# Altium PCB Frida.PcbDoc
Units mm, origin at the board's own origin, x right, y up, seen from the top; angles counter-clockwise.
Board outline 29 x 39 mm, 4 copper layers (L1 (Signal), L2 (GND), L3 (GND), L4 (Signal)), stack 1.586 mm thick; 65 components, 46 nets, 216 pads, 161 vias.
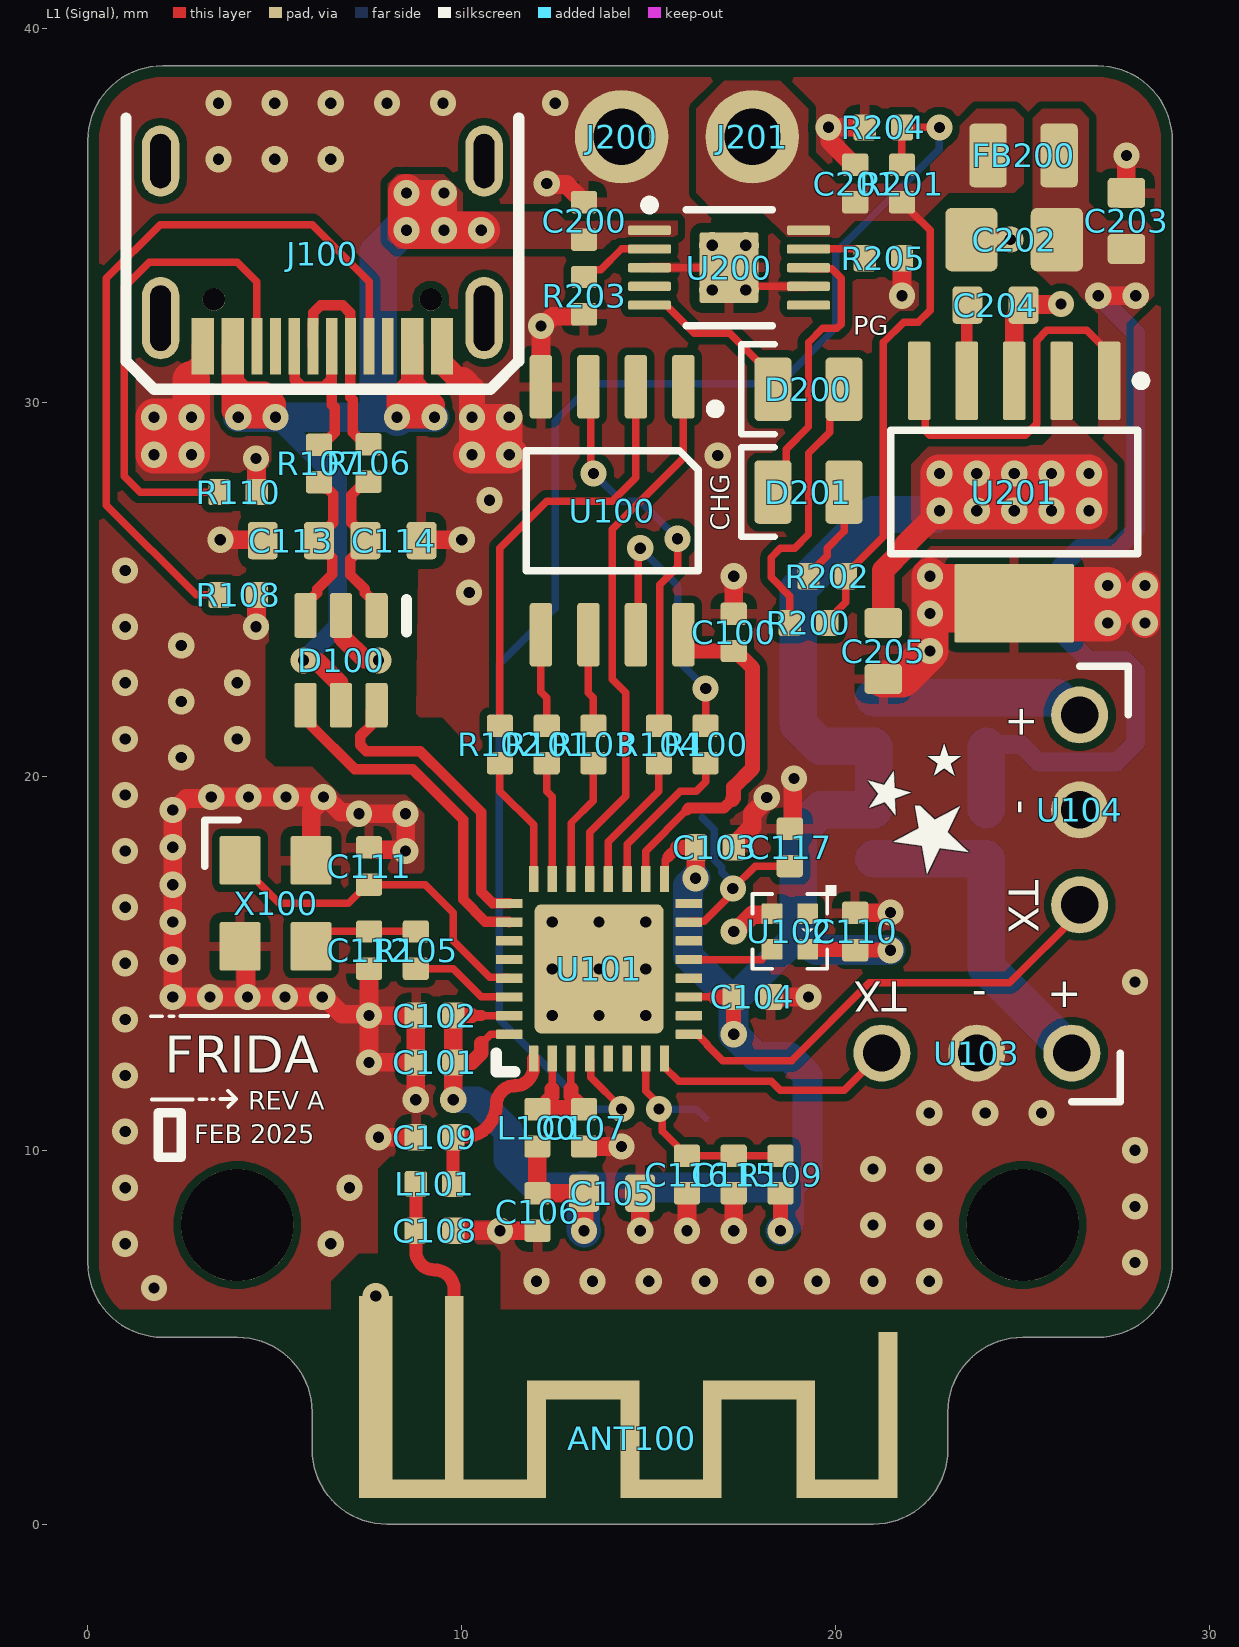
[diagram p0: L1 (Signal) view]
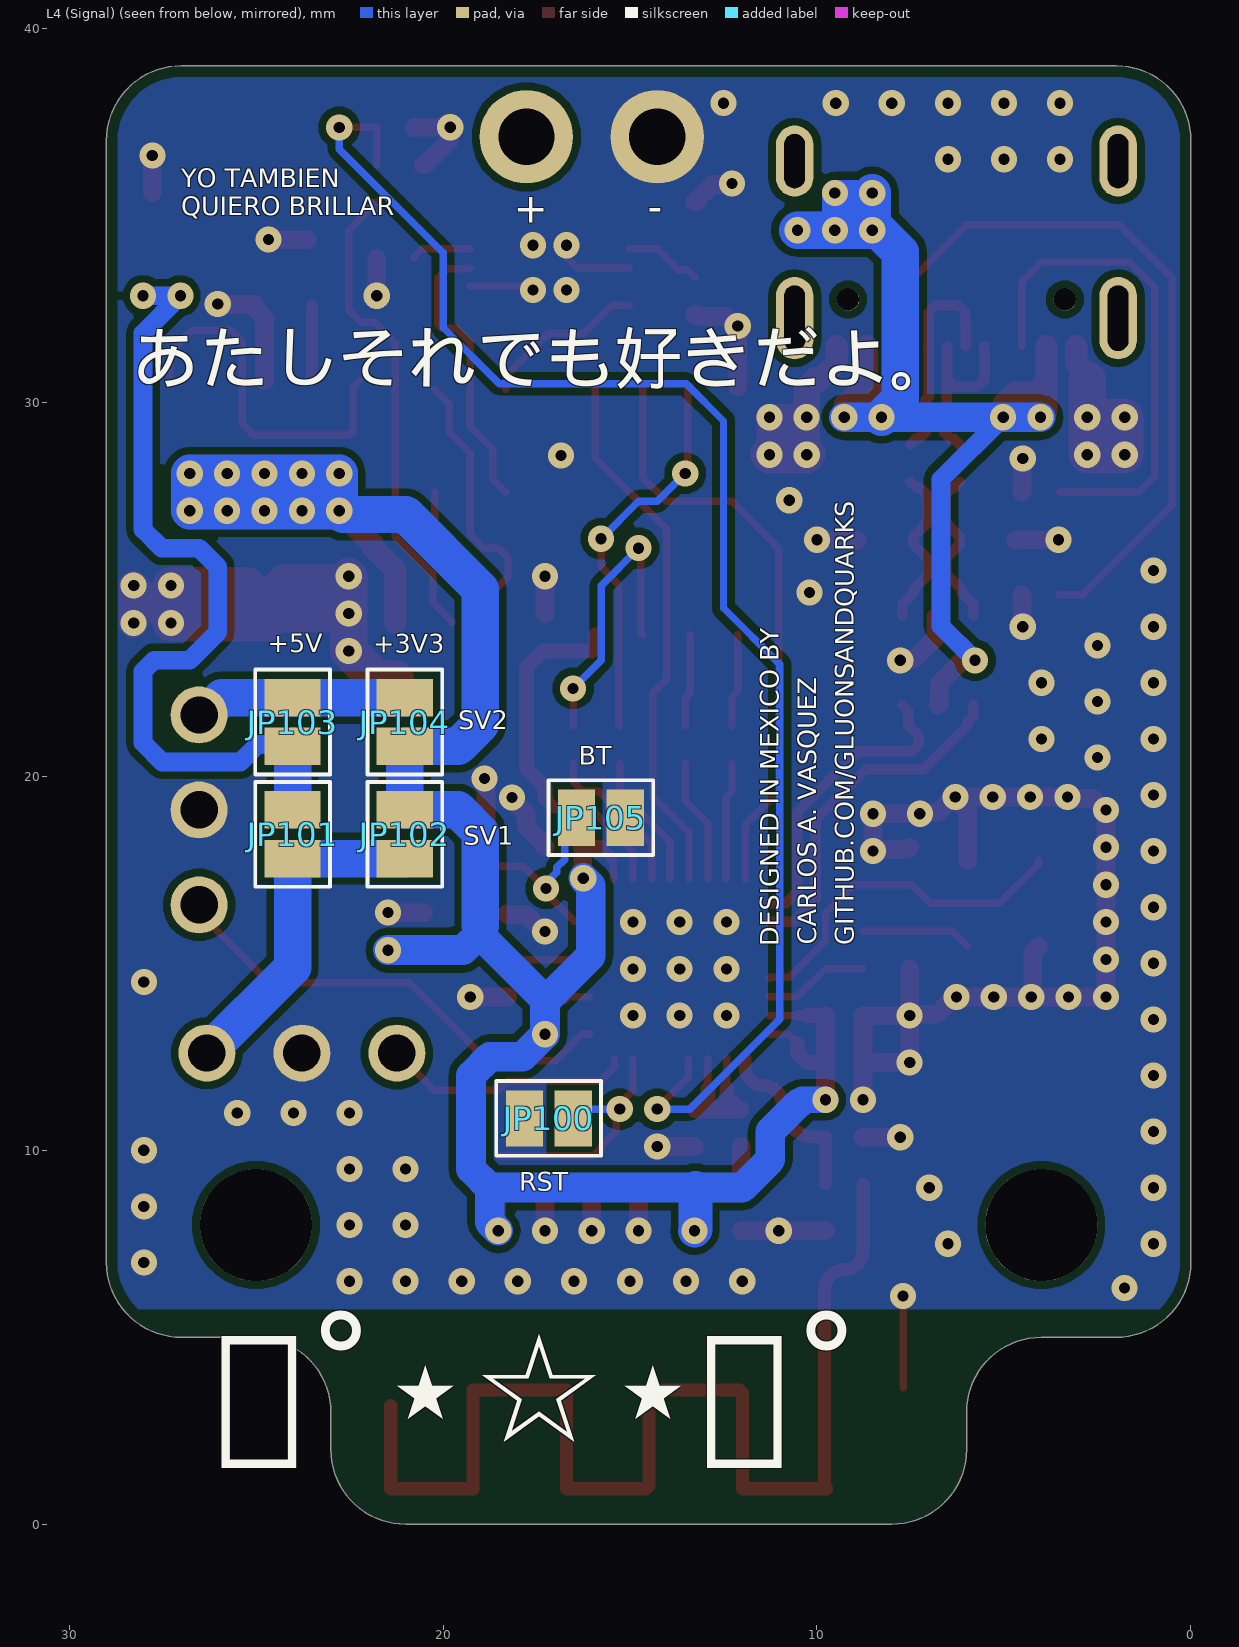
[diagram p1: L4 (Signal) view, seen from below]
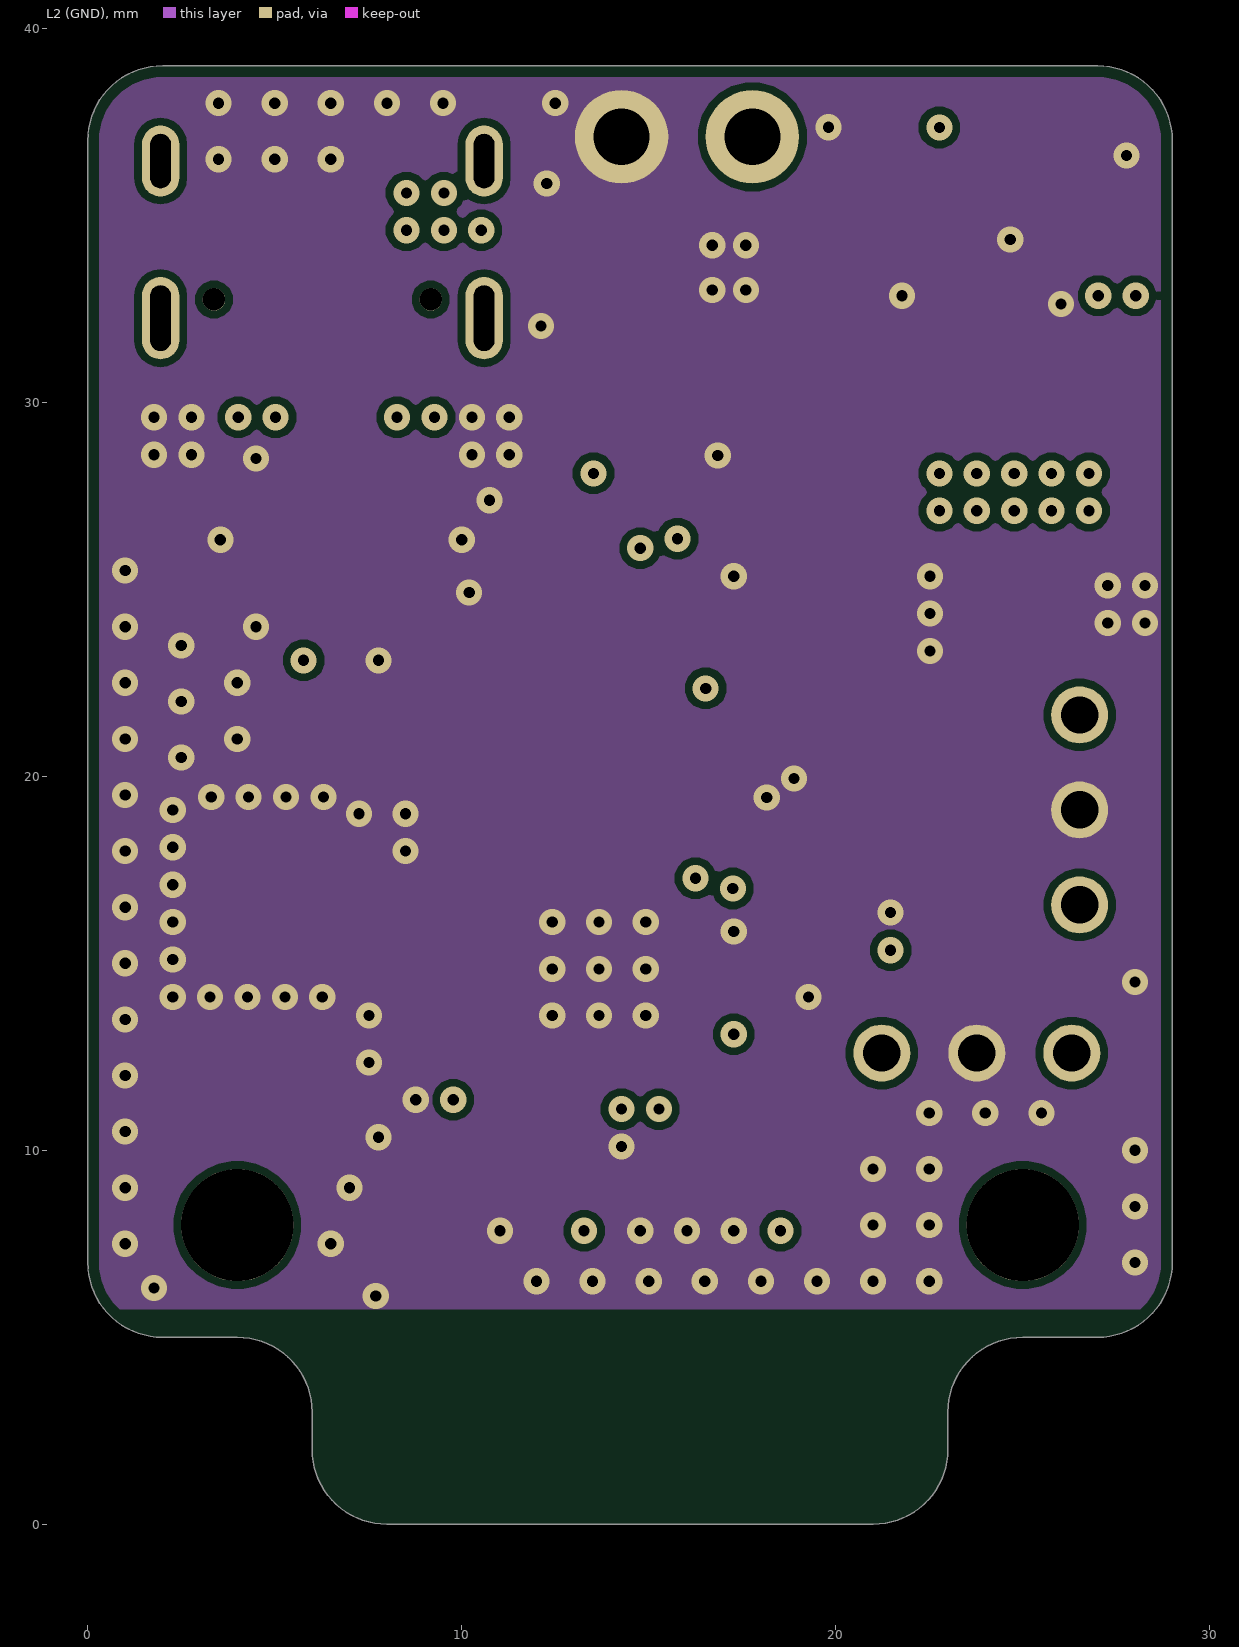
[diagram p2: L2 (GND)]
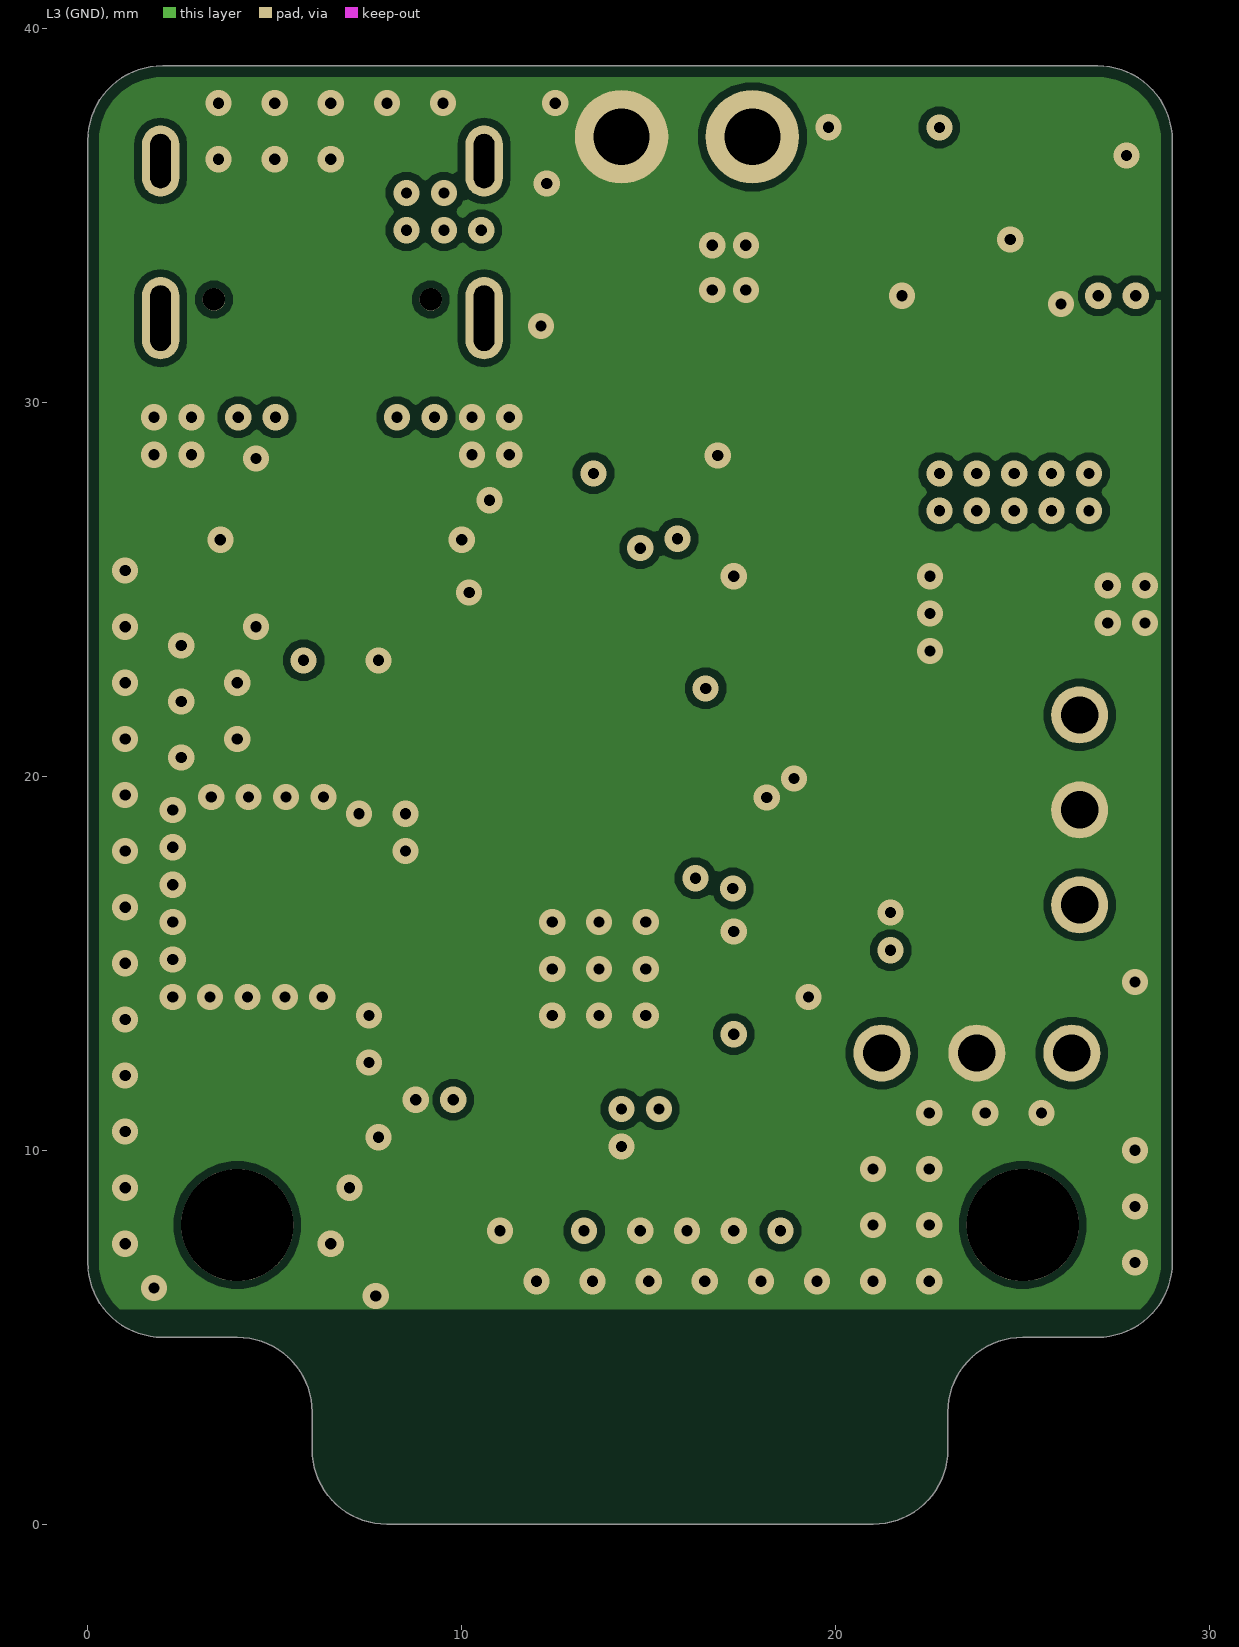
[diagram p3: L3 (GND)]
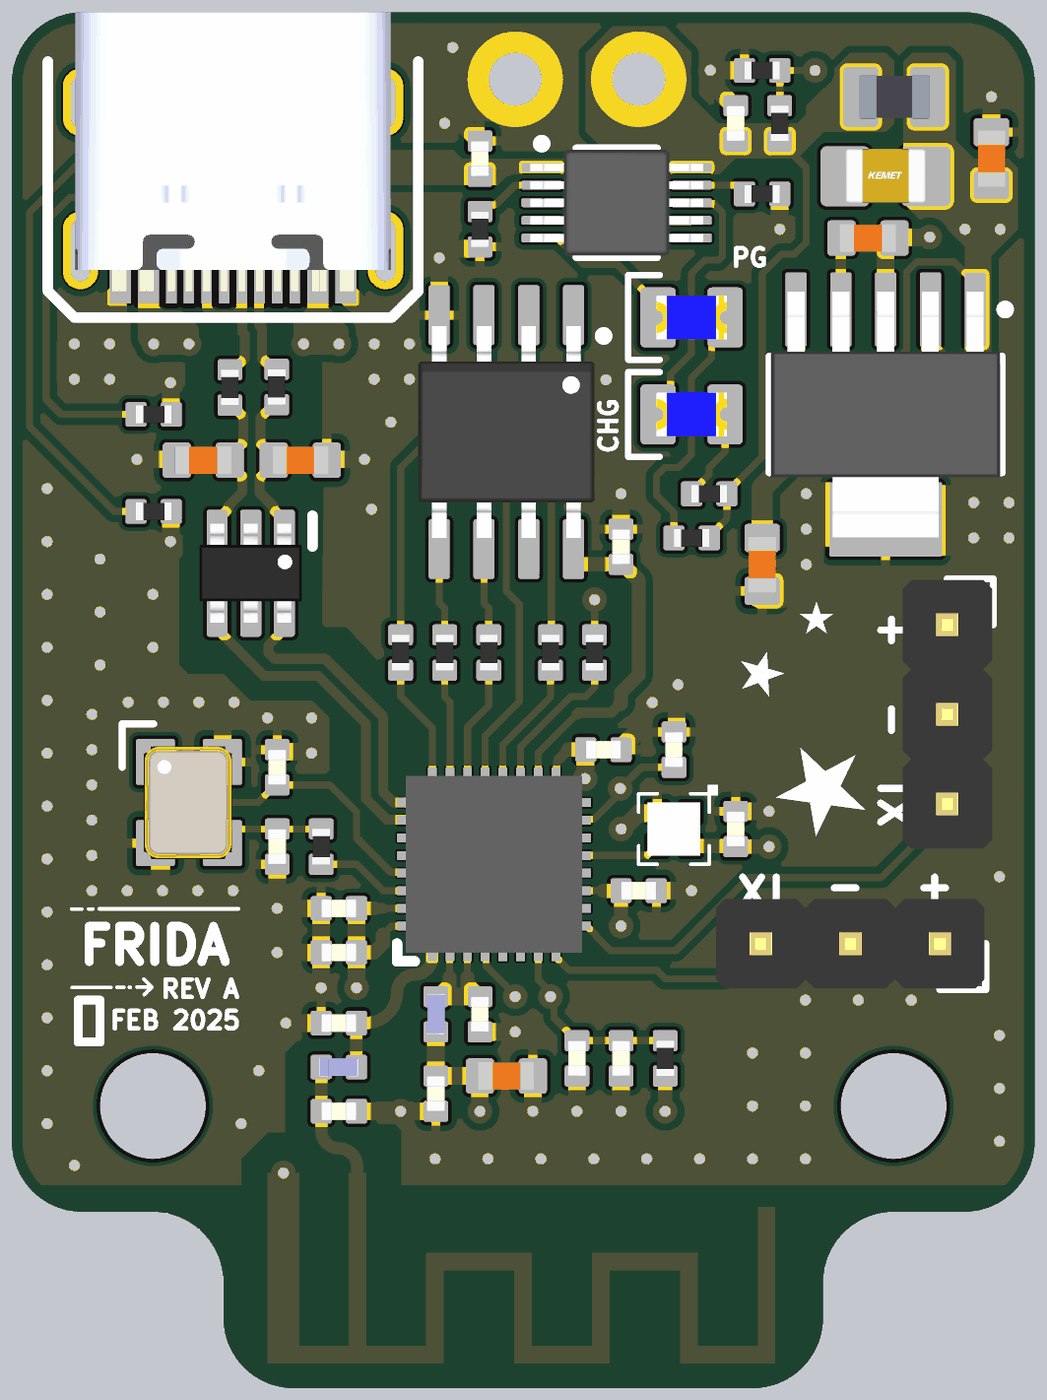
[diagram p4: 3D render of the assembled board from above, using the file's embedded part models]

## Layer stack, top to bottom
Top Solder: solder mask 0.0254, SM-001, Dk 4
L1 (Signal): signal copper 0.035
Dielectric 1: prepreg 0.2104, PP-017, Dk 4.4
L2 (GND): signal copper 0.0152
Dielectric 3: core 1.065, Core-039, Dk 4.6
L3 (GND): signal copper 0.0152
Dielectric 5: prepreg 0.2104, PP-017, Dk 4.4
L4 (Signal): signal copper 0.035
Bottom Solder: solder mask 0.0254, SM-001, Dk 4

## Board outline
4,5 cw(c4,3) 6,3 6,2 ccw(c8,2) 8,0 21,0 ccw(c21,2) 23,2 23,3 cw(c25,3) 25,5 27,5 ccw(c27,7) 29,7 29,37 ccw(c27,37) 27,39 2,39 ccw(c2,37) 0,37 0,7 ccw(c2,7) 2,5

## Design rules (kind name [scope] priority, off if disabled: settings)
BoardOutlineClearance [All] p1: gap=0.3 ignorepadtopadclearanceinfootprint=FALSE
Clearance [All] p1: gap=0.2 ignorepadtopadclearanceinfootprint=FALSE except(0.127: SMDPad-SMDPad; 0.254: Arc-Via Track-Via Via-Via; 0.5: THPad-THPad)
ComponentClearance [All] p1: gap=0 collisioncheckmode=3 verticalgap=0 showdistances=FALSE donotcheckwithout3dbody=TRUE
DiffPairsRouting [InDifferentialPair('USB')] p1: maxlimit=0.254 minlimit=0.2 mostfreqgap=0.254 toplayer_mingap=0.203 toplayer_maxgap=0.203 toplayer_prefgap=0.203 toplayer_minwidth=0.281 toplayer_maxwidth=0.281 toplayer_prefwidth=0.281 bottomlayer_mingap=0.203 bottomlayer_maxgap=0.203 bottomlayer_prefgap=0.203 bottomlayer_minwidth=0.281 bottomlayer_maxwidth=0.281 bottomlayer_prefwidth=0.281 impedanceprofiledriven=TRUE impedanceprofileid={F40FDF7C-DEEF-43B9-82C4-42170DAD1ABB} impedanceprofilevalue=90.000000 maxuncoupledlength=12.7
DiffPairsRouting DiffPairsRouting_1 [InDifferentialPair('USB_CONN')] p2: maxlimit=0.254 minlimit=0.203 mostfreqgap=0.254 toplayer_maxgap=0.203 toplayer_prefgap=0.203 toplayer_minwidth=0.281 toplayer_maxwidth=0.281 toplayer_prefwidth=0.281 bottomlayer_maxgap=0.203 bottomlayer_prefgap=0.203 bottomlayer_minwidth=0.281 bottomlayer_maxwidth=0.281 bottomlayer_prefwidth=0.281 impedanceprofiledriven=TRUE impedanceprofileid={F40FDF7C-DEEF-43B9-82C4-42170DAD1ABB} impedanceprofilevalue=90.000000 maxuncoupledlength=12.7
DiffPairsRouting DiffPairsRouting_2 [InDifferentialPair('USB_RES')] p3: maxlimit=0.254 minlimit=0.203 mostfreqgap=0.254 toplayer_maxgap=0.203 toplayer_prefgap=0.203 toplayer_minwidth=0.281 toplayer_maxwidth=0.281 toplayer_prefwidth=0.281 bottomlayer_maxgap=0.203 bottomlayer_prefgap=0.203 bottomlayer_minwidth=0.281 bottomlayer_maxwidth=0.281 bottomlayer_prefwidth=0.281 impedanceprofiledriven=TRUE impedanceprofileid={F40FDF7C-DEEF-43B9-82C4-42170DAD1ABB} impedanceprofilevalue=90.000000 maxuncoupledlength=12.7
HoleSize [All] p1: absolutevalues=TRUE maxlimit=6.3 minlimit=0.2 maxpercent=80.000 minpercent=20.000
MinimumSolderMaskSliver [All] p1: minsoldermaskwidth=0.08
PolygonConnect PolygonConnect_1 [InNet('GND') AND OnLayer('L1 (Signal)')] p1: thpad.connectstyle=Direct thpad.reliefconductorwidth=0.254 thpad.reliefentries=4 thpad.polygonreliefangle="90 Angle" thpad.airgapwidth=0.254 smdpad.connectstyle=Relief smdpad.reliefconductorwidth=0.254 smdpad.reliefentries=4 smdpad.polygonreliefangle="90 Angle" smdpad.airgapwidth=0.254 via.connectstyle=Direct via.reliefconductorwidth=0.254 via.reliefentries=4 via.polygonreliefangle="90 Angle" via.airgapwidth=0.254
PolygonConnect [All] p2: connectstyle=Direct reliefconductorwidth=0.254 reliefentries=4 polygonreliefangle="90 Angle" airgapwidth=0.254
RoutingVias [All] p1: holewidth=0.4 width=0.8 viastyle="Through Hole" minholewidth=0.3 minwidth=0.7 maxholewidth=6.3 maxwidth=6.7
SilkToSolderMaskClearance [IsPad] p1: minsilkscreentomaskgap=0.15 clearancetoexposedcopper=TRUE
SolderMaskExpansion [All] p1: expansion=0.102 istentingtop=FALSE
UnRoutedNet [All] p1: checkbadconnections=TRUE
Width "Antenna Width" [InNet('ANT')] p1: maxlimit=0.348 minlimit=0.254 preferedwidth=0.348 toplayer_minwidth=0.348 bottomlayer_minwidth=0.348 impedanceprofiledriven=TRUE impedanceprofileid={1C65B92B-DAAA-474E-91AB-F6E60796E809} impedanceprofilevalue=50.000000 minimp=50.000000 maximp=50.000000 favimp=50.000000
Width "Antenna Width_1" [InNet('LNA_IN')] p2: maxlimit=0.348 minlimit=0.254 preferedwidth=0.348 toplayer_minwidth=0.348 bottomlayer_minwidth=0.348 impedanceprofiledriven=TRUE impedanceprofileid={1C65B92B-DAAA-474E-91AB-F6E60796E809} impedanceprofilevalue=50.000000 minimp=50.000000 maximp=50.000000 favimp=50.000000
Width [All] p3: maxlimit=1 minlimit=0.127 preferedwidth=0.3 midlayer1_minwidth=0.254 midlayer1_maxwidth=0.254 midlayer1_prefwidth=0.254 midlayer2_minwidth=0.254 midlayer2_maxwidth=0.254 midlayer2_prefwidth=0.254 minimp=50.000000 maximp=50.000000 favimp=50.000000
24 further rules are at their usual default settings.

## Classes and differential pairs
differential pair USB: +USB_P -USB_N
differential pair USB_RES: +USB_RES_P -USB_RES_N
differential pair USB_CONN: +USB_CONN_P -USB_CONN_N

## Components (designator, comment, footprint, x,y, rotation, side; value= is the part's Value field where it differs from the comment)
ANT100 "PCB Antenna 2.4GHz 50Ohm" ANT_IFA_USB_2_4GHZ_50R 7.698,6.099 r0 top
C100 "1u" CAP_0402 17.273,23.85 r270 top
C101 "100n" CAP_0402 9.273,12.35 r180 top
C102 "100n" CAP_0402 9.273,13.6 r180 top
C103 "100n" CAP_0402 16.773,18.1 r0 top
C104 "100n" CAP_0402 17.773,14.1 r0 top
C105 "10u" CAP_0603 14.023,8.85 r0 top
C106 "100n" CAP_0402 12.023,8.35 r270 top
C107 "1u" CAP_0402 13.273,10.6 r90 top
C108 "3p3" CAP_0402 9.273,7.85 r180 top
C109 "3p3" CAP_0402 9.273,10.35 r0 top
C110 "100n" CAP_0402 20.523,15.85 r270 top
C111 "10p" CAP_0402 7.523,17.6 r90 top
C112 "10p" CAP_0402 7.523,15.35 r270 top
C113 "DNP" CAP_0603 5.429,26.304 r0 top
C114 "DNP" CAP_0603 8.179,26.304 r180 top
C115 "100n" CAP_0402 17.273,9.35 r270 top
C116 "1u" CAP_0402 16.023,9.35 r90 top
C117 "100n" CAP_0402 18.773,18.1 r90 top
C200 "1u" CAP_0402 13.273,34.85 r270 top
C201 "1u" CAP_0402 20.523,35.85 r270 top
C202 "10u" CAP_0805 24.773,34.35 r0 top
C203 "100n" CAP_0603 27.773,34.85 r270 top
C204 "100n" CAP_0603 24.273,32.6 r180 top
C205 "22u" CAP_0603 21.273,23.35 r90 top
D100 "USBLC6-2SC6" SOT-23-6 6.773,23.1 r180 top
D200 "BLUE" LED_0805_BLUE 19.273,30.35 r0 top
D201 "BLUE" LED_0805_BLUE 19.273,27.6 r0 top
FB200 "100R @ 100 MHz" FB_0805 25.023,36.6 r0 top
J100 "TYPE-C-31-M-12" TYPE-C-31-M-12 6.273,34.35 r180 top
J200 "GND" SOLDER_PIN_THT_1_5 14.273,37.1 r90 top
J201 "VBAT" SOLDER_PIN_THT_1_5 17.773,37.1 r90 top
JP100 "RST" "SOLDER JUMPER BRIDGE" 16.523,10.85 r90 bottom
JP101 "VBAT" "SOLDER JUMPER BRIDGE" 24.023,19.1 r0 bottom
JP102 "3V3" "SOLDER JUMPER BRIDGE" 21.023,19.1 r0 bottom
JP103 "VBAT" "SOLDER JUMPER BRIDGE" 24.023,20.8 r180 bottom
JP104 "3V3" "SOLDER JUMPER BRIDGE" 21.023,20.8 r180 bottom
JP105 "BOOT" "SOLDER JUMPER BRIDGE" 16.43,18.893 r270 bottom
L100 "2n2" IND_0402 12.023,10.6 r90 top
L101 "2n2" IND_0402 9.273,9.1 r0 top
R100 "0" RES_0402 16.523,20.85 r90 top
R101 "0" RES_0402 12.273,20.85 r90 top
R102 "0" RES_0402 11.023,20.85 r90 top
R103 "0" RES_0402 13.523,20.85 r90 top
R104 "0" RES_0402 15.273,20.85 r90 top
R105 "22" RES_0402 8.773,15.35 r270 top
R106 "0" RES_0402 7.509,28.378 r90 top
R107 "0" RES_0402 6.181,28.365 r90 top
R108 "5k1" RES_0402 4.023,24.85 r180 top
R109 "10k" RES_0402 18.523,9.35 r270 top
R110 "5k1" RES_0402 4.023,27.6 r180 top
R200 "1k" RES_0402 19.273,24.1 r180 top
R201 "10k" RES_0402 21.773,35.85 r270 top
R202 "1k" RES_0402 19.773,25.35 r180 top
R203 "1k" RES_0402 13.273,32.85 r270 top
R204 "10k" RES_0402 21.273,37.35 r0 top
R205 "10k" RES_0402 21.273,33.85 r180 top
U100 "W25Q128JVSIQ" "SOIC8_208 mil" 14.023,27.1 r270 top
U101 "ESP32-C3" QFN32-5x5 13.673,14.85 r90 top
U102 "SK6805-EC15" SK6805-EC15 18.773,15.85 r0 top
U103 "SERVO1" "GPS UART HEADER" 26.313,12.6 r180 top
U104 "SERVO2" "GPS UART HEADER" 26.523,21.64 r270 top
U200 "BQ24092DGQR" DGQ0010D_L 17.148,33.6 r0 top
U201 "TPS73733DCQR" DCQ0006A_N 24.773,27.6 r270 top
X100 "40MHz" XTAL_3225 5.023,16.6 r270 top

## Footprints (in the part's own frame and the unit in brackets; to place one, negate y for a bottom-side part, rotate by r counter-clockwise, add the part's x,y. Pads: shape width x height; smd on the part's side, far side on the other; paste and mask are expansions set on the pad)
ANT_IFA_USB_2_4GHZ_50R [mm]
  rect 5x0.5 smd paste-2539.97 mask+0.102: 1(2.05,-5.15)
  rect 0.5x4.9 smd paste-2539.97 mask+0.102: 1(2.1,-2.45)
  rect 0.5x2.64 smd paste-2539.97 mask+0.102: 1(4.3,-3.58) 1(6.8,-3.58) 1(9,-3.58) 1(11.5,-3.58)
  rect 2x0.5 smd paste-2539.97 mask+0.102: 1(5.55,-2.51) 1(10.25,-2.51)
  rect 2.7x0.5 smd paste-2539.97 mask+0.102: 1(7.9,-5.15) 1(12.6,-5.15)
  rect 0.5x3.94 smd paste-2539.97 mask+0.102: 1(13.7,-2.93)
  rect 0.9x4.9 smd paste-2539.97 mask+0.102: 2(0,-2.45)
CAP_0402 [mm]
  rrect25% 0.6x0.7 smd: 1(-0.5,0) 2(0.5,0)
  body extent -0.5,-0.26 0.5,0.26, height 0.37
CAP_0603 [mm]
  rrect25% 0.8x1 smd: 1(-0.75,0) 2(0.75,0)
  body extent -0.8,-0.4 0.8,0.4, height 0.51
CAP_0805 [mm]
  rrect25% 1.4x1.7 smd: 1(-1.143,0) 2(1.143,0)
  body extent -1.15,-0.76 1.15,0.79, height 1.01
DCQ0006A_N [mm] "SOT223, 6-Leads, Body 6.55x3.55mm, Pitch 1.27mm, IPC Medium Density"
  rrect17% 2.1x0.6 smd: 1(-2.975,2.54) 2(-2.975,1.27) 3(-2.975,0) 4(-2.975,-1.27) 5(-2.975,-2.54)
  rrect5% 2.1x3.2 smd: 6(2.975,0)
  silkscreen extent -3.1,-3.3 1.65,3.52, body extent -3.48,-3.25 3.48,3.25, height 1.64
DGQ0010D_L [mm] "TSOP, 10-Leads, Body 3.1x3.1mm, Pitch 0.5mm, Thermal Pad 1.88x1.57mm, IPC High Density"
  rrect40% 1.15x0.25 smd mask+0.07: 1(-2.125,1) 2(-2.125,0.5) 3(-2.125,0) 4(-2.125,-0.5) 5(-2.125,-1) 6(2.125,-1) 7(2.125,-0.5) 8(2.125,0) 9(2.125,0.5) 10(2.125,1)
  rrect6% 1.57x1.88 smd: 11(0,0)
  silkscreen extent -2.25,-1.55 1.15,1.8, body extent -2.45,-1.5 2.45,1.5, height 0.94
FB_0805 [mm]
  rrect25% 1x1.7 smd: 1(-0.95,0) 2(0.95,0)
  body extent -1,-0.63 1,0.63, height 0.86
"GPS UART HEADER" [mil]
  round 60 hole 39.37: 1(0,0) 2(100,0) 3(200,0)
  silkscreen extent -51,0 0,51, body extent -50,-50 250,50, height 336
IND_0402 [mm]
  rrect25% 0.6x0.7 smd: 1(-0.5,0) 2(0.5,0)
  body extent -0.56,-0.26 0.56,0.26, height 0.67
LED_0805_BLUE [mm]
  rrect25% 1x1.7 smd: A(0.95,0) K(-0.95,0)
  silkscreen extent -1.8,-1.2 -0.9,1.2, body extent -1,-0.63 1,0.63, height 1.12
QFN32-5x5 [mm]
  rrect10% 0.7x0.25 smd mask+0.05: 1(-2.4,1.75) 2(-2.4,1.25) 3(-2.4,0.75) 4(-2.4,0.25) 5(-2.4,-0.25) 6(-2.4,-0.75) 7(-2.4,-1.25) 8(-2.4,-1.75) 17(2.4,-1.75) 18(2.4,-1.25) 19(2.4,-0.75) 20(2.4,-0.25) 21(2.4,0.25) 22(2.4,0.75) 23(2.4,1.25) 24(2.4,1.75)
  rrect10% 0.25x0.7 smd mask+0.05: 9(-1.75,-2.4) 10(-1.25,-2.4) 11(-0.75,-2.4) 12(-0.25,-2.4) 13(0.25,-2.4) 14(0.75,-2.4) 15(1.25,-2.4) 16(1.75,-2.4) 25(1.75,2.4) 26(1.25,2.4) 27(0.75,2.4) 28(0.25,2.4) 29(-0.25,2.4) 30(-0.75,2.4) 31(-1.25,2.4) 32(-1.75,2.4)
  rrect10% 3.45x3.45 smd mask+0.07: 33(0,0)
  silkscreen extent -2.75,2.25 -2.25,2.75, body extent -2.5,-2.5 2.5,2.5, height 0.85
RES_0402 [mm]
  rrect25% 0.6x0.7 smd: 1(-0.5,0) 2(0.5,0)
  body extent -0.5,-0.25 0.5,0.25, height 0.3
SK6805-EC15 [mm]
  rrect10% 0.55x0.55 smd: 1(-0.475,-0.475) 2(0.475,-0.475) 3(0.475,0.475) 4(-0.475,0.475)
  silkscreen extent -1,-1 1.25,1.25, body extent -0.75,-0.75 0.75,0.75, height 0.66
"SOIC8_208 mil" [mm] "SOIC, 8-Leads, Body 4.91x3.90mm, Pitch 1.27mm, IPC Medium Density"
  rrect25% 1.7x0.6 smd: 1(-3.315,1.905) 2(-3.315,0.635) 3(-3.315,-0.635) 4(-3.315,-1.905) 5(3.315,-1.905) 6(3.315,-0.635) 7(3.315,0.635) 8(3.315,1.905)
  silkscreen extent -2.85,-2.3 1.6,2.88, body extent -3,-2.5 3,2.5, height 1.75
"SOLDER JUMPER BRIDGE" [mm] "Solder Jumper Bridge"
  rect 1.5x1 smd mask+0.07: 1(0,1.3) 2(0,0)
  silkscreen extent -1,-0.75 1,2.06
SOLDER_PIN_THT_1_5 [mm]
  round 2.5 hole 1.5: 1(0,0)
SOT-23-6 [mm]
  rrect25% 0.6x1.2 smd: 1(-0.95,-1.2) 2(0,-1.2) 3(0.95,-1.2) 4(0.95,1.2) 5(0,1.2) 6(-0.95,1.2)
  silkscreen extent -1.75,-1.63 -1.75,-0.76, body extent -1.45,-1.4 1.45,1.4, height 1.45
TYPE-C-31-M-12 [mm]
  rect 0.6x1.5 smd mask+0.07: A1B12(-3.2,2.85) B1A12(3.2,2.85)
  rect 0.6x1.5 smd mask+0.14: A4B9(-2.4,2.85) B4A9(2.4,2.85)
  rect 0.3x1.5 smd mask+0.14: A5(-1.25,2.85) A6(-0.25,2.85) A7(0.25,2.85) A8(1.25,2.85) B5(1.75,2.85) B6(0.75,2.85) B7(-0.75,2.85) B8(-1.75,2.85)
  round 0.6 hole 0.6 unplated mask+0.3: MH(-2.9,1.6) MH(2.9,1.6)
  oval 1x1.9 hole 0.55 slot 1.45 at 90 deg mask+0.05: SH(-4.325,-2.1) SH(4.325,-2.1)
  oval 1x2.2 hole 0.55 slot 1.75 at 90 deg mask+0.05: SH(-4.325,2.1) SH(4.325,2.1)
  silkscreen extent -5.25,-3.25 5.25,4, body extent -4.47,-4.65 4.47,3.25, height 3.32
XTAL_3225 [mm]
  rrect10% 1.3x1.1 smd: 1(-1.15,-0.95) 2(1.15,-0.95) 3(1.15,0.95) 4(-1.15,0.95)
  silkscreen extent -2.23,-1.89 -1,-1, body extent -1.6,-1.28 1.6,1.22, height 0.61

## Part data
ANT100: library part ANT_IFA_USB_2_4GHZ_50R, "Inverted F 2.4GHz ISM PCB Antenna 50 Ohm", ComponentLink1Description=Datasheet, ComponentLink1URL=https://www.ti.com/lit/an/swra117d/swra117d.pdf
C100 C101 C102 C103 C104 C106 C107 C108 C109 C110 C111 C112 C115 C116 C117 C200 C201: library part CAP_0402, "Capacitor SMD 0402"
C105 C113 C114 C203 C204 C205: library part CAP_0603, "Capacitor SMD 0603"
C202: library part CAP_0805, "Capacitor SMD 0805"
D100: "Low-Capacitance ESD Protection USB", Manufacturer=STMicroelectronics, Distributor Link=https://www.mouser.de/ProductDetail/STMicroelectronics/USBLC6-2SC6?qs=po45yt2pPpu%2FhNIlwQdTlg%3D%3D, Manufacturer Part Number=USBLC6-2SC6
D200 D201: library part LED_0805_BLUE, "LED 0805 BLUE SMD"
FB200: library part FB_0805, "Ferrite Bead SMD 0805"
J100: "USB Type C Connector Horizontal SMT", Manufacturer="Koren Hroparts", Manufacturer Part Number=TYPE-C-31-M-12
J200 J201: library part SOLDER_PIN_THT, "Solder Pin 1.5mm Through-Hole"
JP100 JP101 JP102 JP103 JP104 JP105: library part "SOLDER BRIDGE", "Solder Jumper Bridge"
L100 L101: library part IND_0402, "Inductor SMD 0402"
R100 R101 R102 R103 R104 R105 R106 R107 R108 R109 R110 R200 R201 R202 R203 R204 R205: library part RES_0402, "Resistor SMD 0402"
U100: "128M-BIT / SERIAL FLASH MEMORY WITH / DUAL/QUAD SPI & QPI & DTR SOIC-8 208 MIL", Manufacturer=Winbond, Manufacturer Part Number=W25Q128JVSIM
U101: "Ultra­Low­Power SoC with RISC­V Single­Core CPU Supporting IEEE 802.11b/g/n (2.4 GHz Wi­Fi) and Bluetooth® 5 (LE)", LCSC=C2838500, Manufacturer=Espressif, Manufacturer Part Number=ESP32-C3
U103 U104: library part "UART GPS", "UART GPS (3 pin breakout)"
U200: library part CMP-0321-00900-2, "1 A, Single-Input, Single-Cell Li-Ion Battery Charger with Operation Over JEITA and 10 k ohm NTC, 4.5 V, -40 to 150 degC, 10-pin MSOP-PowerPAD (DGQ), Green (RoHS & no Sb/Br)", Manufacturer="Texas Instruments", Over Voltage Protection=N, Code_JEDEC=MO-187-BA-T, ComponentLink1Description=Datasheet, ComponentLink1URL=http://www.ti.com/general/docs/lit/getliterature.tsp?genericPartNumber=BQ24092&fileType=pdf, DatasheetVersion=SLUS968C, Eco-Plan="Green (RoHS & no Sb/Br)", Lead Acid=N, Li-Ion=N, Li-Polymer=N, Mounting Technology="Surface Mount", NiCd=N, NiMH=N, PackageDescription="10-Pin PowerPAD Plastic Small Outline 0.5 mm Pitch, Exposed Pad", PackageReference=DGQ0010D, PackageVersion="revF, Nov-2011", PartNumber=BQ24092DGQR, SubFamily="Battery Charge Management", Vin(Min)(V)=4.5
U201: library part CMP-0395-00300-2, "Single Output LDO, 1 A, Fixed 3.3 V Output, 2.2 to 5.5 V Input, with Reverse Current Protection, 6-pin SOT-223 (DCQ), -40 to 125 degC, Green (RoHS & no Sb/Br)", Manufacturer="Texas Instruments", Rating=Catalog, Accuracy(%)=3, ComponentLink1Description="Manufacturer URL", ComponentLink1URL=http://www.ti.com/, ComponentLink2Description=Datasheet, ComponentLink2URL=http://www.ti.com/general/docs/lit/getliterature.tsp?genericPartNumber=TPS73733&fileType=pdf, ComponentLink3Description="Package Specification", ComponentLink3URL=http://www.ti.com/litv/pdf/mpds098c, DatasheetVersion=SBVS067O, Eco-Plan="Green (RoHS & no Sb/Br)", Fixed Output Options(V)=3.3, Iout(Max)(A)=1, Iq(Typ)(mA)=0.3, Mounting Technology="Surface Mount", PackageDescription="6-Pin Plastic Small Outline, Body 3.5 x 6.5 mm, Pitch 1.27 mm", PackageReference=DCQ0006A, PackageVersion=4202109/D, PartNumber=TPS73733DCQR, SubFamily="Single Channel LDO", Vdo(Typ)(mV)=130, Vin(Max)(V)=5.5, Vin(Min)(V)=2.2, Vout Adj(Max)(V)=3.3, Vout Adj(Min)(V)=3.3
X100: library part TSX-3225_24.0000MF15X-AC, "Crystal SMD 40MHz 10PPM 12pF 3225", Manufacturer=Epson, Manufacturer Part Number="TSX-3225 24.0000MF15X-AC"

## Free pads (board coordinates)
  round 3 hole 3 unplated: MH(4,8) MH(25,8)

## Via types
v1: diameter 0.7, hole 0.3, L1 (Signal) to L4 (Signal), tented both sides, 157 vias
v2: diameter 0.7, hole 0.3, L1 (Signal) to L4 (Signal), tented bottom, 4 vias

## Nets (pads, with @x,y where several pads share a name; then routed paths per layer and width w, separated by ;. In a path a pad name is that pad's centre, name@x,y a point inside that pad or via, vN(x,y) a via of type N, cw(c..) or ccw(c..) an arc to the next point about the centre after c; other vN are vias at no path point)
3V3: C101.1 C102.1 C103.1 C104.1 C105.1 C106.1 C110.2 C205.2 JP102.2 JP104.2 L100.1 R109.2 U101.11 U101.17 U101.31 U101.32 U102.2 U201.2 | length 97.5
  L1 (Signal) w0.2: 10.523,12.85 10.773,13.1 U101.32 ; 10.523,13.6 U101.31 ; U101.17 15.448,17.275 15.448,17.775 15.523,17.85 ; U101.11 16.773,14.1
  L1 (Signal) w0.3: 10.273,13.6 10.523,13.6 ; 15.523,17.85 15.773,18.1
  L1 (Signal) w0.4: C101.1 10.273,12.35 10.523,12.6 10.523,12.85 ; C102.1 10.273,13.6 ; 15.773,18.1 C103.1 ; 16.773,14.1 C104.1 v1(17.273,13.1) ; v1(18.523,7.85) R109.2 ; U102.2 19.26,15.363 20.51,15.363 C110.2 v1(21.469,15.35)
  L1 (Signal) w0.5: v1(9.773,11.35) C101.1 C102.1 ; L100.1 C106.1 C105.1 v1(13.273,7.85) ; v1(16.25,17.275) 16.261,17.287 16.261,18.089 C103.1
  L1 (Signal) w0.6: C205.2 21.273,25.515 21.873,26.115 21.873,26.2 v1(22.773,27.1)
  L1 (Signal) w1: v1(22.773,27.1) v1(23.773,28.1) ; v1(22.773,27.1) v1(22.773,28.1) v1(23.773,28.1) ; v1(22.773,27.1) v1(23.773,27.1) v1(24.773,27.1) ; v1(23.773,28.1) v1(24.773,27.1) ; v1(23.773,28.1) v1(24.773,28.1) v1(25.773,28.1) ; v1(24.773,27.1) v1(25.773,28.1) ; v1(24.773,27.1) v1(25.773,27.1) v1(26.773,27.1) ; v1(25.773,28.1) v1(26.773,27.1) ; v1(25.773,28.1) v1(26.773,28.1) v1(26.773,27.1)
  L4 (Signal) w0.7: v1(9.773,11.35) 10.4,11.35 10.5,11.25
  L4 (Signal) w0.8: 10.5,11.25 11.25,10.5 11.25,9.75 12,9 13.25,9 18.75,9 ; v1(16.25,17.275) 16.051,17.076 16.051,15.199 17.227,14.023 17.273,14.023 ; v1(18.523,7.85) 18.75,8.078 18.75,9 ; 19,16 19,15.819 ; v1(21.469,15.35) 19.469,15.35 19,15.819 ; 17.273,14.023 v1(17.273,13.1) 17.873,12.5 18.75,12.5 19.25,12 19.25,9.5 18.75,9 ; 17.273,14.023 19,15.75 19,15.819
  L4 (Signal) w0.9: 13.25,9 13.25,7.873 v1(13.273,7.85)
  L4 (Signal) w1: 19,16 19,18.5 19.6,19.1 JP102.2 JP104.2 19.586,20.8 19,21.386 19,25 21,27 22.672,27 v1(22.773,27.1) ; v1(22.773,27.1) v1(23.773,28.1) ; v1(22.773,27.1) v1(23.773,27.1) v1(24.773,27.1) ; v1(22.773,27.1) v1(22.773,28.1) v1(23.773,28.1) ; v1(23.773,28.1) v1(24.773,27.1) ; v1(23.773,28.1) v1(24.773,28.1) v1(25.773,28.1) ; v1(24.773,27.1) v1(25.773,28.1) ; v1(24.773,27.1) v1(25.773,27.1) v1(26.773,27.1) ; v1(25.773,28.1) v1(26.773,27.1) ; v1(25.773,28.1) v1(26.773,28.1) v1(26.773,27.1)
ANT: ANT100.1 C108.2 L101.1 | length 33
  L1 (Signal) w0.348: L101.1 C108.2 8.773,7.302 ccw(c9.275,7.302) 9.275,6.8 cw(c9.275,6.277) 9.798,6.277 9.798,3.649 ANT100.1@9.798,0.949 ; ANT100.1@9.748,0.949 ANT100.1@9.798,0.949 ; ANT100.1@21.398,3.169 21.398,0.949 20.298,0.949 19.198,0.949 19.198,2.519 19.198,3.589 17.948,3.589 16.698,3.589 16.698,2.519 16.698,0.949 15.598,0.949 14.573,0.949 14.498,1.025 14.498,2.519 14.498,3.513 14.422,3.589 13.248,3.589 12.073,3.589 11.998,3.513 11.998,2.519 11.998,0.949 ANT100.1@9.798,0.949
CC1: J100.A5 R108.2 | length 20.1
  L1 (Signal) w0.2: R108.2 2.9,24.85 0.5,27.25 0.5,33.316 1.934,34.75 6,34.75 7.523,33.227 J100.A5
CC2: J100.B5 R110.2 | length 13.6
  L1 (Signal) w0.2: R110.2 1.4,27.6 0.973,28.027 0.973,33.079 1.643,33.75 4,33.75 4.523,33.227 J100.B5
CHG: D201.K U200.8 | length 7.7
  L1 (Signal) w0.2: D201.K 18.673,27.95 18.673,28.75 19.273,29.35 19.273,31.6 19.648,31.975 20.03,31.975 20.148,32.093 20.148,33.32 19.893,33.575 19.298,33.575 U200.8
CHG_LED: D201.A R202.2 | length 2.6
  L1 (Signal) w0.2: R202.2 19.273,25.4 19.773,25.9 19.773,26.1 20.223,26.55 D201.A
CHIP_EN: C115.1 C116.2 JP100.2 R109.1 U101.7 | length 6.9
  L1 (Signal) w0.2: U101.7 14.923,11.586 15.273,11.236 v1(15.273,11.1) 15.368,11.005 15.368,10.505 15.773,10.1 15.773,10.05 15.973,9.85 C116.2 C115.1 R109.1
  L4 (Signal) w0.2: v1(15.273,11.1) 16.273,11.1 JP100.2
GND: ANT100.2 C100.1 C101.2 C102.2 C103.2 C104.2 C105.2 C106.2 C107.1 C108.1 C109.1 C110.1 C111.2 C112.2 C113.1 C114.1 C115.2 C116.1 C117.2 C200.1 C201.1 C202.1 C203.1 C204.1 C205.1 D100.2 J100.A1B12 J100.B1A12 J200.1 JP100.1 JP105.1 R108.1 R110.1 R203.2 R204.1 R205.1 U100.4 U101.33 U102.4 U103.2 U104.2 U200.3 U200.7 U200.11 U201.3 U201.6 X100.2 X100.4 | length 100
  L1 (Signal) w0.2: ANT100.2 7.698,6.098 v1(7.7,6.1) ; U200.3 16.413,33.6 16.698,33.885 v2(16.698,34.2) ; v2(17.598,33) 17.698,33.1 U200.7
  L1 (Signal) w0.5: v1(3.546,26.327) 4.655,26.327 C113.1 ; X100.2 4.234,15.289 4.234,14.139 v1(4.273,14.1) ; v1(4.5,24) 4.511,24.011 4.511,24.839 R108.1 ; v1(4.5,28.5) 4.511,28.489 4.511,27.612 R110.1 ; X100.4 5.973,19.063 6.3,19.391 v1(6.3,19.445) ; D100.2 6.823,24.25 6.823,23.708 7.392,23.139 7.734,23.139 v1(7.773,23.1) ; C112.2 v1(7.523,13.6) ; C111.2 7.573,18.05 7.677,18.05 7.689,18.038 8.462,18.038 v1(8.5,18) v1(8.5,19) v1(7.25,19) 7.212,19.038 6.761,19.038 6.354,19.445 v1(6.3,19.445) ; v1(7.773,10.35) C109.1 ; v1(8.773,11.35) C101.2 ; C114.1 8.952,26.327 v1(9.999,26.327) ; C108.1 v1(11.023,7.85) C106.2 ; U100.4 U100.4 12.119,32.037 v1(12.121,32.039) 12.175,32.039 12.437,32.3 13.223,32.3 R203.2 ; v1(12.273,35.85) 12.3,35.823 12.8,35.823 13.173,35.45 13.173,35.4 13.223,35.35 C200.1 ; C107.1 v1(14.273,10.1) ; v1(14.773,7.85) C105.2 ; v1(16.023,7.85) C116.1 ; v1(17.273,7.85) C115.2 ; v1(17.273,15.85) 17.327,15.85 17.777,16.3 18.273,16.3 U102.4 ; C103.2 17.323,18.15 17.323,18.2 17.773,18.65 17.773,18.997 18.157,19.381 v1(18.157,19.435) ; C100.1 v1(17.273,25.35) ; C104.2 v1(19.273,14.1) ; C117.2 18.8,18.6 18.85,18.65 18.85,19.906 v1(18.889,19.944) ; v1(19.804,37.355) v1@19.807,37.353 ; C110.1 20.525,16.352 21.467,16.352 v1(21.469,16.354) ; C201.1 20.473,36.35 19.843,36.98 19.843,37.317 v1@19.807,37.353 ; R204.1 20.77,37.353 v1@19.807,37.353 ; v1(21.773,32.85) R205.1 ; C202.1 v1(24.666,34.35) ; U201.3 24.773,32.25 25.023,32.5 C204.1 25.037,32.615 26.008,32.615 v1(26.023,32.629) ; C203.1 v1(27.773,36.6) ; v1(4.273,14.1) v1(3.273,14.1) v1(2.273,14.1) v1(2.273,15.1) v1(2.273,16.1) v1(2.273,17.1) v1(2.273,18.1) v1(2.273,19.1) 2.327,19.1 2.633,19.407 3.262,19.407 v1(3.3,19.445) v1(4.3,19.445) v1(5.3,19.445) v1(6.3,19.445) ; v1(4.273,14.1) v1(5.273,14.1) v1(6.273,14.1) 6.327,14.1 6.788,13.639 7.484,13.639 v1(7.523,13.6) ; v1(7.523,13.6) v1(7.523,12.35) C101.2 ; v1(7.523,13.6) C102.2 C101.2
  L1 (Signal) w0.6: 2.773,30.6 2.773,30.75 3.073,31.05 J100.B1A12 ; J100.A1B12 9.473,31.05 9.923,30.6 10.023,30.6
  L1 (Signal) w0.7: 10.023,30.6 10.273,30.35 v1@10.273,29.6 ; v1(11.273,28.6) v1(11.273,29.6) ; v1@10.273,29.6 v1(10.273,28.6) v1(11.273,29.6) ; v1@10.273,29.6 v1(10.277,29.6) v1(11.273,29.6)
  L1 (Signal) w0.8: v1(27.273,24.1) v1(28.273,25.1) v1(28.273,24.1)
  L1 (Signal) w1: 2.773,30.6 v1(2.773,29.6) ; v1(10.273,28.6) v1(11.273,28.6) ; C205.1 21.773,22.6 v1(22.523,23.35) v1(22.523,24.35) ; v1(2.773,29.6) v1(1.773,29.6) v1(1.773,28.6) v1(2.773,28.6) v1(2.773,29.6) ; v1(22.523,24.35) U201.6@24.498,24.35 ; v1(22.523,24.35) v1(22.523,25.35) 22.698,25.175 24.223,25.175 U201.6 ; U201.6@24.498,24.35 24.748,24.1 v1(27.273,24.1) v1(27.273,25.1) 25.248,25.1 U201.6 ; U201.6@24.498,24.35 U201.6
  other v1: 1.775,6.318 12,6.5 13.5,6.5 15,6.5 16.5,6.5 18,6.5 19.5,6.5 21,6.5 22.5,6.5 28,7 1,7.5 6.5,7.5 21,8 22.5,8 28,8.5 1,9 7,9 21,9.5 22.5,9.5 28,10 1,10.5 22.5,11 24,11 25.5,11 1,12 1,13.5 12.423,13.6 13.673,13.6 14.923,13.6 28,14.5 12.423,14.85 13.673,14.85 14.923,14.85 1,15 12.423,16.1 13.673,16.1 14.923,16.1 1,16.5 1,18 1,19.5 2.5,20.5 1,21 4,21 2.5,22 1,22.5 4,22.5 2.5,23.5 1,24 10.199,24.915 1,25.5 10.742,27.381 16.847,28.582 3.5,36.5 5,36.5 6.5,36.5 3.5,38 5,38 6.5,38 8,38 9.5,38 12.5,38
  other v2: 16.698,33 17.598,34.2
GPIO9: C117.1 JP105.2 U101.15 | length 5.6
  L1 (Signal) w0.2: U101.15 16.098,16.125 16.49,16.125 17.25,16.886 v1(17.25,17) 17.85,17.6 C117.1
  L4 (Signal) w0.2: JP105.2 16.75,18.573 16.75,17.771 16.954,17.567 16.954,17.431 17.25,17.135 v1(17.25,17)
ISET: R203.1 U200.2 | length 2.1
  L1 (Signal) w0.2: R203.1 13.463,33.541 13.713,33.541 14.273,34.1 U200.2
LNA_IN: C109.2 L101.2 U101.1 | length 4.7
  L1 (Signal) w0.348: L101.2 C109.2 10.05,10.35 ccw(c10.05,11.225) 10.925,11.225 cw(c11.425,11.225) 11.425,11.725 ccw(c11.425,12.223) 11.923,12.223 U101.1
NR_PIN: C204.2 U201.4 | length 2
  L1 (Signal) w0.3: U201.4 23.503,32.58 C204.2
PG: D200.K U200.5 | length 4.4
  L1 (Signal) w0.2: U200.5 15.473,32.6 16.223,31.85 17.173,31.85 18.323,30.7 D200.K
PG_LED: D200.A R200.2 | length 7.5
  L1 (Signal) w0.2: R200.2 18.773,24.82 18.273,25.32 18.273,25.85 18.523,26.1 18.905,26.1 19.273,26.468 19.273,28.637 19.838,29.202 19.838,29.966 D200.A
PWM_CH0: U101.8 U103.3 | length 6.7
  L1 (Signal) w0.2: U101.8 15.423,12.225 15.798,11.85 18.273,11.85 18.523,11.6 20.233,11.6 U103.3
PWM_CH1: U101.9 U104.3 | length 12.6
  L1 (Signal) w0.2: U101.9 16.298,13.1 16.569,12.829 16.569,12.809 16.981,12.396 18.819,12.396 20.898,14.475 24.648,14.475 26.523,16.35 U104.3
SPI_CS: U100.1 U101.21 | length 14.5
  L1 (Signal) w0.2: U101.21 13.423,18.5 14.389,19.467 14.389,22.234 14.023,22.6 14.023,26.6 15.928,28.505 U100.1
SPICLK_FLASH: R103.2 U100.6 | length 2.5
  L1 (Signal) w0.2: U100.6 13.388,22.235 13.523,22.1 R103.2
SPICLK_MCU: R103.1 U101.22 | length 3.3
  L1 (Signal) w0.2: U101.22 12.923,18.75 13.523,19.35 R103.1
SPID_FLASH: R101.2 U100.5 | length 2.5
  L1 (Signal) w0.2: U100.5 12.118,22.255 12.273,22.1 R101.2
SPID_MCU: R101.1 U101.23 | length 3.2
  L1 (Signal) w0.2: R101.1 12.273,19.6 12.423,19.45 U101.23
SPIHD_FLASH: R100.2 U100.7 | length 7.8
  L1 (Signal) w0.2: U100.7 14.715,23.843 14.715,26.043 v1(14.773,26.1) ; R100.2 v1(16.523,22.35)
  L4 (Signal) w0.2: v1(14.773,26.1) 15.773,25.1 15.773,23.1 v1(16.523,22.35)
SPIHD_MCU: R100.1 U101.19 | length 4.2
  L1 (Signal) w0.2: U101.19 14.423,18.185 15.838,19.6 16.273,19.6 16.523,19.85 R100.1
SPIQ_FLASH: R102.2 U100.2 | length 11.6
  L1 (Signal) w0.2: R102.2 11.023,26.1 12.273,27.35 14.023,27.35 14.658,27.985 U100.2
SPIQ_MCU: R102.1 U101.24 | length 3.5
  L1 (Signal) w0.2: R102.1 11.023,19.6 11.923,18.7 U101.24
SPIWP_FLASH: R104.2 U100.3 | length 10.6
  L1 (Signal) w0.2: U100.3 13.455,30.348 13.455,28.168 v1(13.523,28.1) ; R104.2 15.297,21.375 15.297,25.125 15.773,25.6 v1(15.773,26.35)
  L4 (Signal) w0.2: v1(13.523,28.1) 14.273,27.35 14.773,27.35 v1(15.773,26.35)
SPIWP_MCU: R104.1 U101.20 | length 3.7
  L1 (Signal) w0.2: U101.20 13.923,18.25 15.273,19.6 R104.1
SV1_VCC: JP101.1 JP102.1 U103.1 | length 9.1
  L4 (Signal) w1: JP102.1 JP101.1 24.023,14.89 U103.1
SV2_VCC: JP103.1 JP104.1 U104.1 | length 5.7
  L4 (Signal) w1: JP104.1 JP103.1 25.921,22.1 26.381,21.64 U104.1
TS: R205.2 U200.9 | length 1.6
  L1 (Signal) w0.2: U200.9 20.573,34.1 20.773,33.9 R205.2
USB_CONN_N: J100.A7 J100.B7 R106.2 | length 5.8
  L1 (Signal) w0.281: J100.A7 6.023,32.1 6.032,32.11 6.032,32.392 6.232,32.591 6.814,32.591 7.013,32.392 7.013,31.51 J100.B7@7.015,31.508 ; J100.B7 J100.B7@7.015,31.508 ; R106.2 7.349,29.037 7.252,29.037 7.087,29.202 7.087,30.07 7.015,30.142 J100.B7@7.015,31.508
USB_CONN_P: J100.A6 J100.B6 R107.2 | length 5.8
  L1 (Signal) w0.281: J100.B6 5.532,31.491 5.532,30.609 5.732,30.41 6.314,30.41 6.513,30.609 J100.A6@6.513,31.491 ; R107.2 6.341,29.025 6.438,29.025 6.603,29.189 6.603,29.87 6.53,29.942 6.53,31.474 J100.A6@6.513,31.491 ; J100.A6 J100.A6@6.513,31.491
USB_N: D100.6 U101.25 | length 8.2
  L1 (Signal) w0.281: D100.6 7.563,21.741 7.563,21.353 7.281,21.071 7.281,20.838 7.445,20.674 8.884,20.674 9.615,19.943 10.523,19.035 10.523,16.908 10.83,16.6 U101.25
USB_P: D100.4 U101.26 | length 9.3
  L1 (Signal) w0.281: D100.4 5.823,21.6 5.982,21.441 5.982,21.353 7.146,20.189 8.684,20.189 9.113,19.76 10.038,18.835 10.038,16.708 10.63,16.116 11.257,16.116 U101.26
USB_RES_N: C114.2 D100.1 R106.1 | length 4.4
  L1 (Signal) w0.281: R106.1 7.349,27.718 7.252,27.718 7.046,27.512 7.046,26.786 7.429,26.404 C114.2 7.429,26.204 7.023,25.798 7.023,25.388 7.413,24.998 7.413,24.91 7.723,24.6 D100.1
USB_RES_P: C113.2 D100.3 R107.1 | length 4.4
  L1 (Signal) w0.281: D100.3 5.823,24.6 6.132,24.91 6.132,24.998 6.538,25.404 6.538,25.844 6.179,26.204 C113.2 6.179,26.404 6.561,26.786 6.561,27.541 6.397,27.706 6.341,27.706 R107.1
USR_LED: U101.13 U102.1 | length 2.3
  L1 (Signal) w0.2: U101.13 18.023,15.1 U102.1
VBAT: C201.2 FB200.1 J201.1 R200.1 R201.2 R202.1 U200.10 | length 13
  L1 (Signal) w0.2: R200.1 19.773,24.15 20.273,24.65 R202.1 20.273,25.4 21.273,26.4 21.273,31.6 21.819,32.146 22.201,32.146 22.523,32.468 22.523,34.6 22.023,35.1 22.023,35.15 21.823,35.35 R201.2
VBUS: C200.2 D100.5 J100.A4B9 J100.B4A9 U200.1 | length 45.3
  L1 (Signal) w0.5: v1(5.773,23.1) 5.811,23.062 6.153,23.062 6.723,22.493 6.723,21.95 D100.5
  L1 (Signal) w0.6: J100.B4A9@3.873,31.25 J100.B4A9@3.873,30.875 ; J100.B4A9 J100.B4A9@3.873,30.875 ; J100.A4B9 8.673,30.512 ; J100.B4A9@3.873,30.875 3.873,29.778 v1@4.023,29.628 ; J100.B4A9@3.873,30.875 3.873,30.543 4.165,30.25 4.346,30.25 ; v1@4.023,29.628 4.327,29.932 4.327,30.232 4.346,30.25 ; v1@4.023,29.628 v1(4.023,29.6) v1@4.996,29.6 ; 4.346,30.25 v1@4.996,29.6 ; 4.346,30.25 4.716,30.25 5.003,29.963 5.003,29.62 v1(5.023,29.6) v1@4.996,29.6 ; v1@8.3,29.6 8.915,30.216 8.968,30.216 ; v1@8.3,29.6 v1(9.273,29.6) 9.253,29.62 9.253,29.931 8.968,30.216 ; v1@8.3,29.6 v1(8.273,29.6) 8.292,29.62 8.292,30.12 8.673,30.5 8.673,30.512 ; 8.673,30.512 8.968,30.216
  L1 (Signal) w0.7: v1(8.523,34.6) v1(9.523,35.6) ; v1(8.523,35.6) v1(9.523,35.6) ; v1(9.523,34.6) v1(9.523,35.6)
  L1 (Signal) w1: v1(8.523,35.6) v1(8.523,34.6) v1(9.523,34.6) v1(10.523,34.6)
  L4 (Signal) w0.5: v1(5.023,29.6) 6.683,27.94 6.683,24.011 v1(5.773,23.1)
  L4 (Signal) w0.7: v1(8.523,35.6) v1(9.523,35.6) v1(9.523,34.6)
  L4 (Signal) w0.8: v1(4.023,29.6) v1(5.023,29.6) 7.773,29.6 v1(8.273,29.6) v1(9.273,29.6)
  L4 (Signal) w1: v1(8.273,29.6) 7.773,30.1 7.773,34.015 8.358,34.6 v1(8.523,34.6) ; v1(10.523,34.6) v1(9.523,34.6) ; v1(8.523,34.6) v1(9.523,34.6) ; v1(8.523,34.6) v1(8.523,35.6) v1(9.523,34.6)
VCC: C202.2 C203.2 FB200.2 JP101.2 JP103.2 U201.1 U201.5 | length 33.1
  L1 (Signal) w0.2: U201.5 22.398,30.41 22.398,29.24 22.515,29.122 25.064,29.122 25.373,29.431 25.373,31.65 25.648,31.925 26.713,31.925 27.313,31.325 U201.1
  L1 (Signal) w0.5: v1(27.023,32.85) v1(28.023,32.85)
  L4 (Signal) w0.5: JP103.2 24.073,20.85 24.956,20.85 25.426,20.38 27.509,20.38 28.023,20.893 28.023,22.808 27.73,23.1 26.773,23.1 26.023,23.85 26.023,25.6 26.523,26.1 27.523,26.1 28.023,26.6 28.023,31.85 v1(27.023,32.85) v1(28.023,32.85)
  L4 (Signal) w1: JP101.2 JP103.2
VDD3P3_FILT: C107.2 L100.2 U101.2 U101.3 | length 4.3
  L1 (Signal) w0.2: 12.413,11.641 12.416,11.644 U101.2@12.416,12.444 ; 12.917,11.643 12.918,11.645 U101.3@12.918,12.446
  L1 (Signal) w0.4: 12.413,11.641 12.413,11.441 L100.2@12.073,11.1 ; 12.917,11.643 12.917,11.456 13.123,11.25 13.123,11.2 13.223,11.1 C107.2 ; L100.2@12.073,11.1 L100.2 L100.2@12.073,11.1
  L1 (Signal) w0.5: L100.2@12.073,11.1 C107.2@13.223,11.1
VDD_SPI: C100.2 U100.8 U101.18 | length 9.8
  L1 (Signal) w0.2: U101.18 14.923,18 16.023,19.1 ; C100.2 C100.2@17.323,23.35
  L1 (Signal) w0.3: 16.023,19.1 16.073,19.15 17.007,19.15 17.24,19.383
  L1 (Signal) w0.4: U100.8 15.928,23.45 16.028,23.35 C100.2 ; 17.24,19.383 17.273,19.416 17.273,19.709 17.773,20.209 17.773,22.9 C100.2@17.323,23.35
VSENSE: R201.1 R204.2 U101.4 | length 39.6
  L1 (Signal) w0.2: U101.4 13.448,12.425 13.448,11.956 14.273,11.131 v1(14.273,11.1) ; R201.1 R204.2 v1(22.773,37.35)
  L4 (Signal) w0.2: v1(14.273,11.1) 13.4,11.1 11,13.5 11,23 12.5,24.5 12.5,29.5 13.5,30.5 18.5,30.5 20,32 20,34 22.773,36.773 v1(22.773,37.35)
XTAL_N: C111.1 U101.29 X100.1 | length 9.4
  L1 (Signal) w0.2: X100.1 4.073,17.65 5.123,16.6 6.973,16.6 7.473,17.1 C111.1 9.023,17.1 9.773,16.35 9.773,15.6 10.748,14.625 11.248,14.625 U101.29
XTAL_P: R105.2 U101.30 | length 2.8
  L1 (Signal) w0.2: R105.2 9.773,14.85 10.523,14.1 U101.30
XTAL_P_RES: C112.1 R105.1 X100.3 | length 3
  L1 (Signal) w0.2: X100.3 6.373,15.85 C112.1 R105.1
pads on no net: J100.A8 J100.B8 J100.MH J100.SH U101.5 U101.6 U101.10 U101.12 U101.14 U101.16 U101.27 U101.28 U102.3 U200.4 U200.6

## Polygon pours and split planes (outlines as drawn)
GND on L1 (Signal) "GND_L01_P007" (solid, remove dead copper, pour order 7): 0,40 0,0 30,0 30,40
VBUS on L1 (Signal) "VBUS_L01_P000" (solid, pour order 0): 15.773,34.35 14.023,34.35 13.773,34.1 8.273,34.1 8.023,34.35 8.023,35.85 8.273,36.1 9.523,36.1 10.023,35.6 10.023,35.1 12.523,35.1 12.773,34.85 15.773,34.85 12.773,34.85 15.773,34.85
VBAT on L1 (Signal) "VBAT_L01_P001" (solid, pour order 1): 17.023,38.6 16.273,37.85 16.273,35.6 16.773,35.1 18.023,35.1 18.773,34.35 20.023,34.35 20.523,34.85 22.273,34.85 23.023,35.6 24.773,35.6 25.023,35.85 25.023,37.6 24.773,37.85 23.773,37.85 23.273,37.35 23.273,37.1 22.523,36.35 22.523,36.1 22.273,35.85 20.023,35.85 19.273,36.6 19.273,37.85 18.523,38.6
VCC on L1 (Signal) "VCC_L01_P002" (solid, pour order 2): 25.523,37.85 25.273,37.6 25.273,33.6 25.773,33.1 26.273,33.1 27.023,32.35 27.023,29.35 27.773,29.35 27.773,32.1 28.523,32.85 28.523,34.6 28.273,34.85 27.273,34.85 26.773,35.35 26.773,37.6 26.523,37.85
3V3 on L1 (Signal) "3V3_L01_P003" (solid, pour order 3): 25.773,31.6 26.273,31.6 26.273,29.6 27.523,28.35 27.523,26.6 27.273,26.35 22.523,26.35 22.023,26.85 22.023,28.35 22.523,28.85 25.523,28.85 25.773,29.1
GND on L3 (GND) "GND_L03_P005" (solid, pour order 5): 0,40 0,0 30,0 30,40
GND on L2 (GND) "GND_L02_P004" (solid, pour order 4): 0,40 0,0 30,0 30,40
GND on L4 (Signal) "GND_L04_P006" (solid, pour order 6): 0,40 0,0 30,0 30,40

## Other copper
L1 (Signal):
  pour cut-out: 11.75,15.75 10.75,15.75 9,17.5 9,19 8.5,19.5 6.75,19.5 6,20.25 5,20.25 4.75,20.5 4.75,23.5 4.843,23.593 4.843,25.592 5.105,25.854 5.105,27.147 4.843,27.409 4.843,28.355 4.913,28.425 4.913,29.05 5.25,29.05 5.493,29.293 5.493,30.131 7.619,30.131 8,29.75 8,29.214 8.117,29.098 8.175,29.156 8.761,29.156 8.802,29.115 8.802,27.064 8.788,27.064 8.535,26.811 8.535,25.755 8.59,25.755 8.844,25.5 8.788,21.575 9.486,21.575 11,19.94 11,17.5 11.75,16.75
  pour cut-out: 11.285,11.399 11.311,11.425 11.62,11.425 11.62,8.237 11.515,8.132 10.233,8.132 10.043,8.323 10.03,8.309 9.484,8.309 9.326,8.152 9.326,7.416 9.405,7.337 9.55,7.481 10.858,7.481 11.048,7.291 11.048,5.536 6.5,5.536 6.5,6.5 7.25,7.25 7.75,7.25 7.75,9.5 8.088,9.838 9.088,9.838 9.25,10 9.247,10.003 9.247,10.741 9.254,10.741 9.399,10.886 10.168,10.886 10.601,11.32 10.601,11.392
  pour cut-out: 0,0 29.5,0 29.5,5.75 0,5.75
L2 (GND):
  pour cut-out: 0,0 29.5,0 29.5,5.75 0,5.75
L3 (GND):
  pour cut-out: 0,0 29.5,0 29.5,5.75 0,5.75
L4 (Signal):
  pour cut-out: 0,0 29.5,0 29.5,5.75 0,5.75

## Silkscreen, mask and mechanical layers (free items; w line width, h text height)
Top Overlay:
  lines w0.1: 1.692,13.583 1.983,13.583 ; 1.709,11.358 2.81,11.358 ; 2.177,13.585 2.3,13.585 ; 2.477,13.588 6.434,13.588 ; 2.981,11.364 3.177,11.364 ; 3.33,11.364 3.365,11.364 ; 3.549,11.371 3.97,11.371 ; 3.746,11.595 3.97,11.371 ; 3.754,11.155 3.97,11.371
  lines w0.254: 1.88,9.813 2.5,9.813 2.5,11 1.88,11 1.88,9.813
  text "PG" at 20.466,31.808 h0.5
  text "CHG" at 17.153,26.564 h0.5 r90
  text "⋆" at 22.148,19.07 h3
  text "⋆" at 19.941,18.118 h4 r344.21
  text "⋆" at 22.622,14.829 h8 r28.11
  text "FRIDA" at 2.058,12.079 h1
  text "REV A" at 4.294,11.083 h0.5
  text "FEB 2025" at 2.851,10.191 h0.5
Bottom Overlay:
  text "YO TAMBIEN / QUIERO BRILLAR" at 27,35 h0.5
  text "-" at 14.519,34.838 h0.8
  text "+" at 18.104,34.807 h0.8
  text "あたしそれでも好きだよ。" at 28.339,30.081 h2.3
  text "+3V3" at 21.867,23.306 h0.5
  text "+5V" at 24.686,23.313 h0.5
  text "SV2" at 19.594,21.253 h0.5
  text "BT" at 16.367,20.306 h0.5
  text "SV1" at 19.447,18.176 h0.5
  text "GITHUB.COM/GLUONSANDQUARKS" at 9.019,15.486 h0.5 r270
  text "CARLOS A. VASQUEZ" at 10.023,15.495 h0.5 r270
  text "DESIGNED IN MEXICO BY" at 11.027,15.46 h0.5 r270
  text "RST" at 17.958,8.914 h0.5
  text "⭒˚⋆☆⋆⭒˚" at 26.113,1.239 h5

## Text inside footprints (layer, text, board x,y; h text height)
D200: Mechanical 13 "+" at 21.039,31.351 h1
D201: Mechanical 13 "+" at 21.039,28.601 h1
U102: Mechanical 13 "3" at 19.873,16.901 h0.3
U103: Top Overlay "+" at 26.579,14.5 h0.8 r180; Top Overlay "-" at 24.039,14.5 h0.8 r180; Top Overlay "TX" at 21.899,14.5 h0.8 r180
U104: Top Overlay "-" at 24.623,19.367 h0.8 r270; Top Overlay "+" at 24.623,21.907 h0.8 r270; Top Overlay "TX" at 24.623,17.227 h0.8 r270